# EAGLE board spu-pcb(unfinished) (EAGLE 9.6.2)

Size 161.27 x 129.21 mm. Coordinates in mm from the lower left corner, seen from the top.
Outline: 1.27,0 161.27,0 161.27,129.21 0,129.21 1.27,0
Copper layers (1*16): Top 0.035mm / dielectric 1.5mm / Bottom 0.035mm
Design rules "default": minimum track width 6mil, minimum drill 0.35mm, track to track 6mil, track to pad 6mil, pad to pad 6mil, via to via 6mil, smd to smd 6mil, copper to edge 40mil, drill to drill 6mil, minimum pad ring 10mil, minimum via ring 8mil, stop-mask expansion 4mil, vias tented up to drill 0mil, thermal gap 10mil

## Footprints (pad centres in the part's own frame; a part is rotated, then mirrored left to right if it is on the bottom)
1X08 = drill 1.016 long: 1 -8.89,0; 2 -6.35,0; 3 -3.81,0; 4 -1.27,0; 5 1.27,0; 6 3.81,0; 7 6.35,0; 8 8.89,0
1X01 = drill 1.016 octagon: 1 0,0
DIL16 = drill 0.813 long: 1 -8.89,-3.81; 2 -6.35,-3.81; 3 -3.81,-3.81; 4 -1.27,-3.81; 5 1.27,-3.81; 6 3.81,-3.81; 7 6.35,-3.81; 8 8.89,-3.81; 9 8.89,3.81; 10 6.35,3.81; 11 3.81,3.81; 12 1.27,3.81; 13 -1.27,3.81; 14 -3.81,3.81; 15 -6.35,3.81; 16 -8.89,3.81
DIL20 = drill 0.813 long: 1 -11.43,-3.81; 2 -8.89,-3.81; 3 -6.35,-3.81; 4 -3.81,-3.81; 5 -1.27,-3.81; 6 1.27,-3.81; 7 3.81,-3.81; 8 6.35,-3.81; 9 8.89,-3.81; 10 11.43,-3.81; 11 11.43,3.81; 12 8.89,3.81; 13 6.35,3.81; 14 3.81,3.81; 15 1.27,3.81; 16 -1.27,3.81; 17 -3.81,3.81; 18 -6.35,3.81; 19 -8.89,3.81; 20 -11.43,3.81
DIL14 = drill 0.813 long: 1 -7.62,-3.81; 2 -5.08,-3.81; 3 -2.54,-3.81; 4 0,-3.81; 5 2.54,-3.81; 6 5.08,-3.81; 7 7.62,-3.81; 8 7.62,3.81; 9 5.08,3.81; 10 2.54,3.81; 11 0,3.81; 12 -2.54,3.81; 13 -5.08,3.81; 14 -7.62,3.81
1X02 = drill 1.016 long: 1 -1.27,0; 2 1.27,0
DIL28-6 = drill 0.813 long: 1 -16.51,-7.62; 2 -13.97,-7.62; 3 -11.43,-7.62; 4 -8.89,-7.62; 5 -6.35,-7.62; 6 -3.81,-7.62; 7 -1.27,-7.62; 8 1.27,-7.62; 9 3.81,-7.62; 10 6.35,-7.62; 11 8.89,-7.62; 12 11.43,-7.62; 13 13.97,-7.62; 14 16.51,-7.62; 15 16.51,7.62; 16 13.97,7.62; 17 11.43,7.62; 18 8.89,7.62; 19 6.35,7.62; 20 3.81,7.62; 21 1.27,7.62; 22 -1.27,7.62; 23 -3.81,7.62; 24 -6.35,7.62; 25 -8.89,7.62; 26 -11.43,7.62; 27 -13.97,7.62; 28 -16.51,7.62

## Placement (x,y rotation side)
ADDRESS  [1X08]  22.86,113.03 0 top
DATA  [1X08]  44.45,113.03 0 top
HALT  [1X01]  8.89,113.03 0 top
IC1  74LS173N  [DIL16]  142.24,58.42 0 top
IC2  74LS173N  [DIL16]  113.03,58.42 0 top
IC3  74LS173N  [DIL16]  50.8,35.56 0 top
IC4  74LS173N  [DIL16]  26.67,72.39 0 top
IC5  74AC245N  [DIL20]  139.7,87.63 0 top
IC6  74AC245N  [DIL20]  20.32,35.56 0 top
IC7  74LS173N  [DIL16]  22.86,13.97 0 top
IC8  74LS173N  [DIL16]  39.37,101.6 0 top
IC9  74AC245N  [DIL20]  114.3,35.56 0 top
IC10  74AC245N  [DIL20]  110.49,87.63 0 top
IC11  74LS86N  [DIL14]  144.78,119.38 0 top
IC12  74LS283N  [DIL16]  142.24,72.39 0 top
IC13  74LS283N  [DIL16]  143.51,102.87 0 top
IC14  74LS86N  [DIL14]  91.44,102.87 0 top
IC15  74LS173N  [DIL16]  64.77,101.6 0 top
IC16  74S02N  [DIL14]  82.55,58.42 0 top
IC17  74LS08N  [DIL14]  59.69,86.36 0 top
IC18  74AC245N  [DIL20]  110.49,72.39 0 top
IC19  74LS173N  [DIL16]  13.97,101.6 0 top
IC20  74LS173N  [DIL16]  57.15,58.42 0 top
IC21  74AC245N  [DIL20]  81.28,35.56 0 top
IC22  74LS161  [DIL16]  116.84,102.87 0 top
IC23  74LS161  [DIL16]  91.44,119.38 0 top
IC24  74LS173N  [DIL16]  119.38,119.38 0 top
IC25  74LS173N  [DIL16]  30.48,58.42 0 top
IC26  74AC245N  [DIL20]  78.74,72.39 0 top
IC27  74LS04N  [DIL14]  38.1,86.36 0 top
IC28  74LS04N  [DIL14]  15.24,86.36 0 top
IC29  74LS04N  [DIL14]  82.55,87.63 0 top
IC30  74LS161  [DIL16]  144.78,35.56 0 top
IC31  74LS04N  [DIL14]  52.07,72.39 0 top
JP2  CLOCK/RW  [1X02]  67.31,113.03 0 top
POWER  5V/GND  [1X02]  58.42,113.03 0 top
U1  AT28C256  [DIL28-6]  138.43,13.97 0 top
U2  AT28C256  [DIL28-6]  55.88,13.97 0 top
U3  AT28C256  [DIL28-6]  96.52,13.97 0 top

## Library data of the parts
ADDRESS DATA HALT JP2 POWER = pinhead
IC1-IC4 IC7 IC8 IC15 IC19 IC20 IC24 IC25 = 74xx-us
IC5 IC6 IC9-IC14 IC16-IC18 IC21-IC23 IC26-IC31 = 74xx-eu
U1-U3 = bt_memory

## Nets
!ADDRESSLATCH: IC24.9 IC24.10 IC25.9 IC25.10 IC29.4
!ALUOUT: IC10.19 IC28.12
!ALUSAVE: IC15.9 IC15.10 IC29.2
!AOUT: IC5.19 IC27.12
!BOUT: IC9.19 IC27.6
!CLEARCOUNT: IC22.1 IC23.1 IC28.8
!COUNTEROUT: IC26.19 IC28.10
!IDOUT: IC6.19 IC28.4
!IOENABLE: IC18.19 IC29.6
!IOUT: IC21.19 IC27.8
!LOADA: IC2.9 IC2.10 IC4.9 IC4.10 IC27.2
!LOADB: IC7.9 IC7.10 IC8.9 IC8.10 IC27.4
!LOADCOUNT: IC22.9 IC23.9 IC28.6
!LOADI: IC19.9 IC19.10 IC20.9 IC20.10 IC27.10
!LOADID: IC1.9 IC1.10 IC3.9 IC3.10 IC28.2
AD1: ADDRESS.8 IC24.3
AD2: ADDRESS.7 IC24.4
AD3: ADDRESS.6 IC24.5
AD4: ADDRESS.5 IC24.6
AD5: ADDRESS.4 IC25.3
AD6: ADDRESS.3 IC25.4
AD7: ADDRESS.2 IC25.5
AD8: ADDRESS.1 IC25.6
ALU-SUB: IC11.2 IC11.5 IC11.10 IC11.13 IC13.7 IC14.2 IC14.5 IC14.10 IC14.13 U2.17
ALUOVERFLOW: IC15.3 U1.24 U2.24 U3.24
ALUZERO: IC15.4 U1.25 U2.25 U3.25
AR1: IC4.6 IC5.2 IC13.5
AR2: IC4.5 IC5.3 IC13.3
AR3: IC4.4 IC5.4 IC13.14
AR4: IC4.3 IC5.5 IC13.12
AR5: IC2.6 IC5.6 IC12.5
AR6: IC2.5 IC5.7 IC12.3
AR7: IC2.4 IC5.8 IC12.14
AR8: IC2.3 IC5.9 IC12.12
BR1: IC8.6 IC9.2 IC14.12
BR2: IC8.5 IC9.3 IC14.1
BR3: IC8.4 IC9.4 IC11.4
BR4: IC8.3 IC9.5 IC11.1
BR5: IC7.6 IC9.6 IC11.9
BR6: IC7.5 IC9.7 IC11.12
BR7: IC7.4 IC9.8 IC14.4
BR8: IC7.3 IC9.9 IC14.9
BR9: IC3.6 IC6.2
BR10: IC3.5 IC6.3
BR11: IC3.4 IC6.4
BR12: IC3.3 IC6.5
BR13: IC1.5 IC6.7
BR14: IC1.6 IC6.6
BR15: IC1.4 IC6.8
BR16: IC1.3 IC6.9
BUS1: IC3.11 IC4.11 IC5.18 IC6.18 IC8.11 IC9.18 IC10.2 IC18.2 IC20.11 IC21.18 IC22.3 IC24.14 IC26.2
BUS2: IC3.12 IC4.12 IC5.17 IC6.17 IC8.12 IC9.17 IC10.3 IC18.3 IC20.12 IC21.17 IC22.4 IC24.13 IC26.3
BUS3: IC3.13 IC4.13 IC5.16 IC6.16 IC8.13 IC9.16 IC10.4 IC18.4 IC20.13 IC21.16 IC22.5 IC24.12 IC26.4
BUS4: IC3.14 IC4.14 IC5.15 IC6.15 IC8.14 IC9.15 IC10.5 IC18.5 IC20.14 IC21.15 IC22.6 IC24.11 IC26.5
BUS5: IC1.11 IC2.11 IC5.14 IC6.14 IC7.11 IC9.14 IC10.6 IC18.6 IC19.11 IC21.14 IC23.3 IC25.14 IC26.6
BUS6: IC1.12 IC2.12 IC5.13 IC6.13 IC7.12 IC9.13 IC10.7 IC18.7 IC19.12 IC21.13 IC23.4 IC25.13 IC26.7
BUS7: IC1.13 IC2.13 IC5.12 IC6.12 IC7.13 IC9.12 IC10.8 IC18.8 IC19.13 IC21.12 IC23.5 IC25.12 IC26.8
BUS8: IC1.14 IC2.14 IC5.11 IC6.11 IC7.14 IC9.11 IC10.9 IC18.9 IC19.14 IC21.11 IC23.6 IC25.11 IC26.9
CLEARA: IC2.15 IC4.15 U3.17
CLEARB: IC7.15 IC8.15 U3.13
CLEARF: IC15.15 U2.15
CLEARI: IC19.15 IC20.15 U1.19
CLEARID: IC1.15 IC3.15 U1.16
CLOCK: IC1.7 IC2.7 IC3.7 IC4.7 IC7.7 IC8.7 IC15.7 IC19.7 IC20.7 IC24.7 IC25.7 IC30.2 IC31.1 IC31.2 JP2.1
COUNTEN: IC22.7 IC22.10 U2.19
D1: DATA.8 IC18.18
D2: DATA.7 IC18.17
D3: DATA.6 IC18.16
D4: DATA.5 IC18.15
D5: DATA.4 IC18.14
D6: DATA.3 IC18.13
D7: DATA.2 IC18.12
D8: DATA.1 IC18.11
GND: IC1.1 IC1.2 IC1.8 IC2.1 IC2.2 IC2.8 IC3.1 IC3.2 IC3.8 IC4.1 IC4.2 IC4.8 IC5.10 IC6.10 IC7.1 IC7.2 IC7.8 IC8.1 IC8.2 IC8.8 IC9.10 IC10.1 IC10.10 IC11.7 IC12.8 IC13.8 IC14.7 IC15.1 IC15.2 IC15.8 IC16.7 IC17.7 IC18.10 IC19.1 IC19.2 IC19.8 IC20.1 IC20.2 IC20.8 IC21.10 IC22.8 IC23.8 IC24.1 IC24.2 IC24.8 IC25.1 IC25.2 IC25.8 IC26.1 IC26.10 IC27.7 IC28.7 IC29.7 IC30.8 IC31.7 POWER.2 U1.2 U1.20 U1.21 U1.22 U1.23 U1.26 U2.1 U2.2 U2.20 U2.21 U2.22 U2.23 U2.26 U3.1 U3.2 U3.20 U3.21 U3.22 U3.23
HALT: HALT.1 U3.19
I1: IC20.6 IC21.2
I2: IC20.5 IC21.3
I3: IC20.4 IC21.4
I4: IC20.3 IC21.5
I5: IC19.6 IC21.6 U1.7 U2.7 U3.7
I6: IC19.5 IC21.7 U1.8 U2.8 U3.8
I7: IC19.4 IC21.8 U1.9 U2.9 U3.9
I8: IC19.3 IC21.9 U1.10 U2.10 U3.10
N$1: IC12.7 IC13.9
N$2: IC12.11 IC14.8
N$3: IC12.9 IC15.14
N$4: IC10.14 IC12.4 IC16.6
N$5: IC10.13 IC12.1 IC16.5
N$6: IC13.6 IC14.11
N$7: IC13.2 IC14.3
N$8: IC11.6 IC13.15
N$9: IC11.3 IC13.11
N$10: IC10.18 IC13.4 IC16.8
N$11: IC10.17 IC13.1 IC16.9
N$12: IC10.16 IC13.13 IC16.11
N$13: IC10.15 IC13.10 IC16.12
N$14: IC10.12 IC12.13 IC16.3
N$15: IC10.11 IC12.10 IC16.2
N$16: IC16.1 IC17.1
N$17: IC22.15 IC23.7 IC23.10
N$18: IC29.3 U2.12
N$19: IC22.2 IC23.2
N$20: IC29.5 U2.11
N$21: IC11.8 IC12.6
N$22: IC11.11 IC12.2
N$23: IC12.15 IC14.6
N$24: IC22.14 IC26.18
N$25: IC22.13 IC26.17
N$26: IC16.4 IC17.2
N$27: IC16.10 IC17.4
N$28: IC16.13 IC17.5
N$29: IC17.3 IC17.9
N$30: IC17.6 IC17.10
N$31: IC15.13 IC17.8
N$32: IC22.12 IC26.16
N$33: IC22.11 IC26.15
N$34: IC23.14 IC26.14
N$35: IC23.13 IC26.13
N$36: IC23.12 IC26.12
N$37: IC23.11 IC26.11
N$38: IC29.1 U2.16
N$39: IC28.13 U2.18
N$40: IC28.11 U1.11
N$41: IC28.9 U1.12
N$42: IC28.5 U1.13
N$43: IC28.3 U1.15
N$44: IC28.1 U1.17
N$45: IC27.9 U1.18
N$46: IC27.11 U3.11
N$47: IC27.5 U3.12
N$48: IC27.3 U3.15
N$49: IC27.13 U3.16
N$50: IC27.1 U3.18
N$51: IC30.14 U1.3 U2.3 U3.3
N$55: IC30.13 U1.4 U2.4 U3.4
N$56: IC30.12 U1.5 U2.5 U3.5
N$57: IC30.11 U1.6 U2.6 U3.6
RWIO: IC18.1 JP2.2 U2.13
VCC: IC1.16 IC2.16 IC3.16 IC4.16 IC5.1 IC5.20 IC6.1 IC6.20 IC7.16 IC8.16 IC9.1 IC9.20 IC10.20 IC11.14 IC12.16 IC13.16 IC14.14 IC15.16 IC16.14 IC17.14 IC18.20 IC19.16 IC20.16 IC21.1 IC21.20 IC22.16 IC23.16 IC24.16 IC25.16 IC26.20 IC27.14 IC28.14 IC29.14 IC30.1 IC30.7 IC30.9 IC30.10 IC30.16 IC31.14 POWER.1 U1.1 U1.27 U2.27 U3.26 U3.27

## Tracks (layer width: path | path; a pad name or v marks a point on that pad's centre or on a via)
!ADDRESSLATCH  (4 unrouted)
!ALUOUT  (1 unrouted)
!ALUSAVE  (2 unrouted)
!AOUT  (1 unrouted)
!BOUT  (1 unrouted)
!CLEARCOUNT  (2 unrouted)
!COUNTEROUT  (1 unrouted)
!IDOUT  (1 unrouted)
!IOENABLE  (1 unrouted)
!IOUT  (1 unrouted)
!LOADA  (4 unrouted)
!LOADB  (4 unrouted)
!LOADCOUNT  (2 unrouted)
!LOADI  (4 unrouted)
!LOADID  (4 unrouted)
AD1  (1 unrouted)
AD2  (1 unrouted)
AD3  (1 unrouted)
AD4  (1 unrouted)
AD5  (1 unrouted)
AD6  (1 unrouted)
AD7  (1 unrouted)
AD8  (1 unrouted)
ALU-SUB  (9 unrouted)
ALUOVERFLOW  (3 unrouted)
ALUZERO  (3 unrouted)
AR1  (2 unrouted)
AR2  (2 unrouted)
AR3  (2 unrouted)
AR4  (2 unrouted)
AR5  (2 unrouted)
AR6  (2 unrouted)
AR7  (2 unrouted)
AR8  (2 unrouted)
BR1  (2 unrouted)
BR2  (2 unrouted)
BR3  (2 unrouted)
BR4  (2 unrouted)
BR5  (2 unrouted)
BR6  (2 unrouted)
BR7  (2 unrouted)
BR8  (2 unrouted)
BR9  (1 unrouted)
BR10  (1 unrouted)
BR11  (1 unrouted)
BR12  (1 unrouted)
BR13  (1 unrouted)
BR14  (1 unrouted)
BR15  (1 unrouted)
BR16  (1 unrouted)
BUS1  (12 unrouted)
BUS2  (12 unrouted)
BUS3  (12 unrouted)
BUS4  (12 unrouted)
BUS5  (12 unrouted)
BUS6  (12 unrouted)
BUS7  (12 unrouted)
BUS8  (12 unrouted)
CLEARA  (2 unrouted)
CLEARB  (2 unrouted)
CLEARF  (1 unrouted)
CLEARI  (2 unrouted)
CLEARID  (2 unrouted)
CLOCK  (14 unrouted)
COUNTEN  (2 unrouted)
D1  (1 unrouted)
D2  (1 unrouted)
D3  (1 unrouted)
D4  (1 unrouted)
D5  (1 unrouted)
D6  (1 unrouted)
D7  (1 unrouted)
D8  (1 unrouted)
GND  (74 unrouted)
HALT  (1 unrouted)
I1  (1 unrouted)
I2  (1 unrouted)
I3  (1 unrouted)
I4  (1 unrouted)
I5  (4 unrouted)
I6  (4 unrouted)
I7  (4 unrouted)
I8  (4 unrouted)
N$1  (1 unrouted)
N$2  (1 unrouted)
N$3  (1 unrouted)
N$4  (2 unrouted)
N$5  (2 unrouted)
N$6  (1 unrouted)
N$7  (1 unrouted)
N$8  (1 unrouted)
N$9  (1 unrouted)
N$10  (2 unrouted)
N$11  (2 unrouted)
N$12  (2 unrouted)
N$13  (2 unrouted)
N$14  (2 unrouted)
N$15  (2 unrouted)
N$16  (1 unrouted)
N$17  (2 unrouted)
N$18  (1 unrouted)
N$19  (1 unrouted)
N$20  (1 unrouted)
N$21  (1 unrouted)
N$22  (1 unrouted)
N$23  (1 unrouted)
N$24  (1 unrouted)
N$25  (1 unrouted)
N$26  (1 unrouted)
N$27  (1 unrouted)
N$28  (1 unrouted)
N$29  (1 unrouted)
N$30  (1 unrouted)
N$31  (1 unrouted)
N$32  (1 unrouted)
N$33  (1 unrouted)
N$34  (1 unrouted)
N$35  (1 unrouted)
N$36  (1 unrouted)
N$37  (1 unrouted)
N$38  (1 unrouted)
N$39  (1 unrouted)
N$40  (1 unrouted)
N$41  (1 unrouted)
N$42  (1 unrouted)
N$43  (1 unrouted)
N$44  (1 unrouted)
N$45  (1 unrouted)
N$46  (1 unrouted)
N$47  (1 unrouted)
N$48  (1 unrouted)
N$49  (1 unrouted)
N$50  (1 unrouted)
N$51  (3 unrouted)
N$55  (3 unrouted)
N$56  (3 unrouted)
N$57  (3 unrouted)
RWIO  (2 unrouted)
VCC  (44 unrouted)